# Altium PCB L80PCBFILE.PcbDoc
Units mm, origin at the board's own origin, x right, y up, seen from the top; angles counter-clockwise.
Board outline 108.02 x 109.16 mm, 4 copper layers (Top Layer, L2GP, L3GP, Bottom Layer), stack 1.072 mm thick; 53 components, 43 nets, 203 pads, 87 vias.
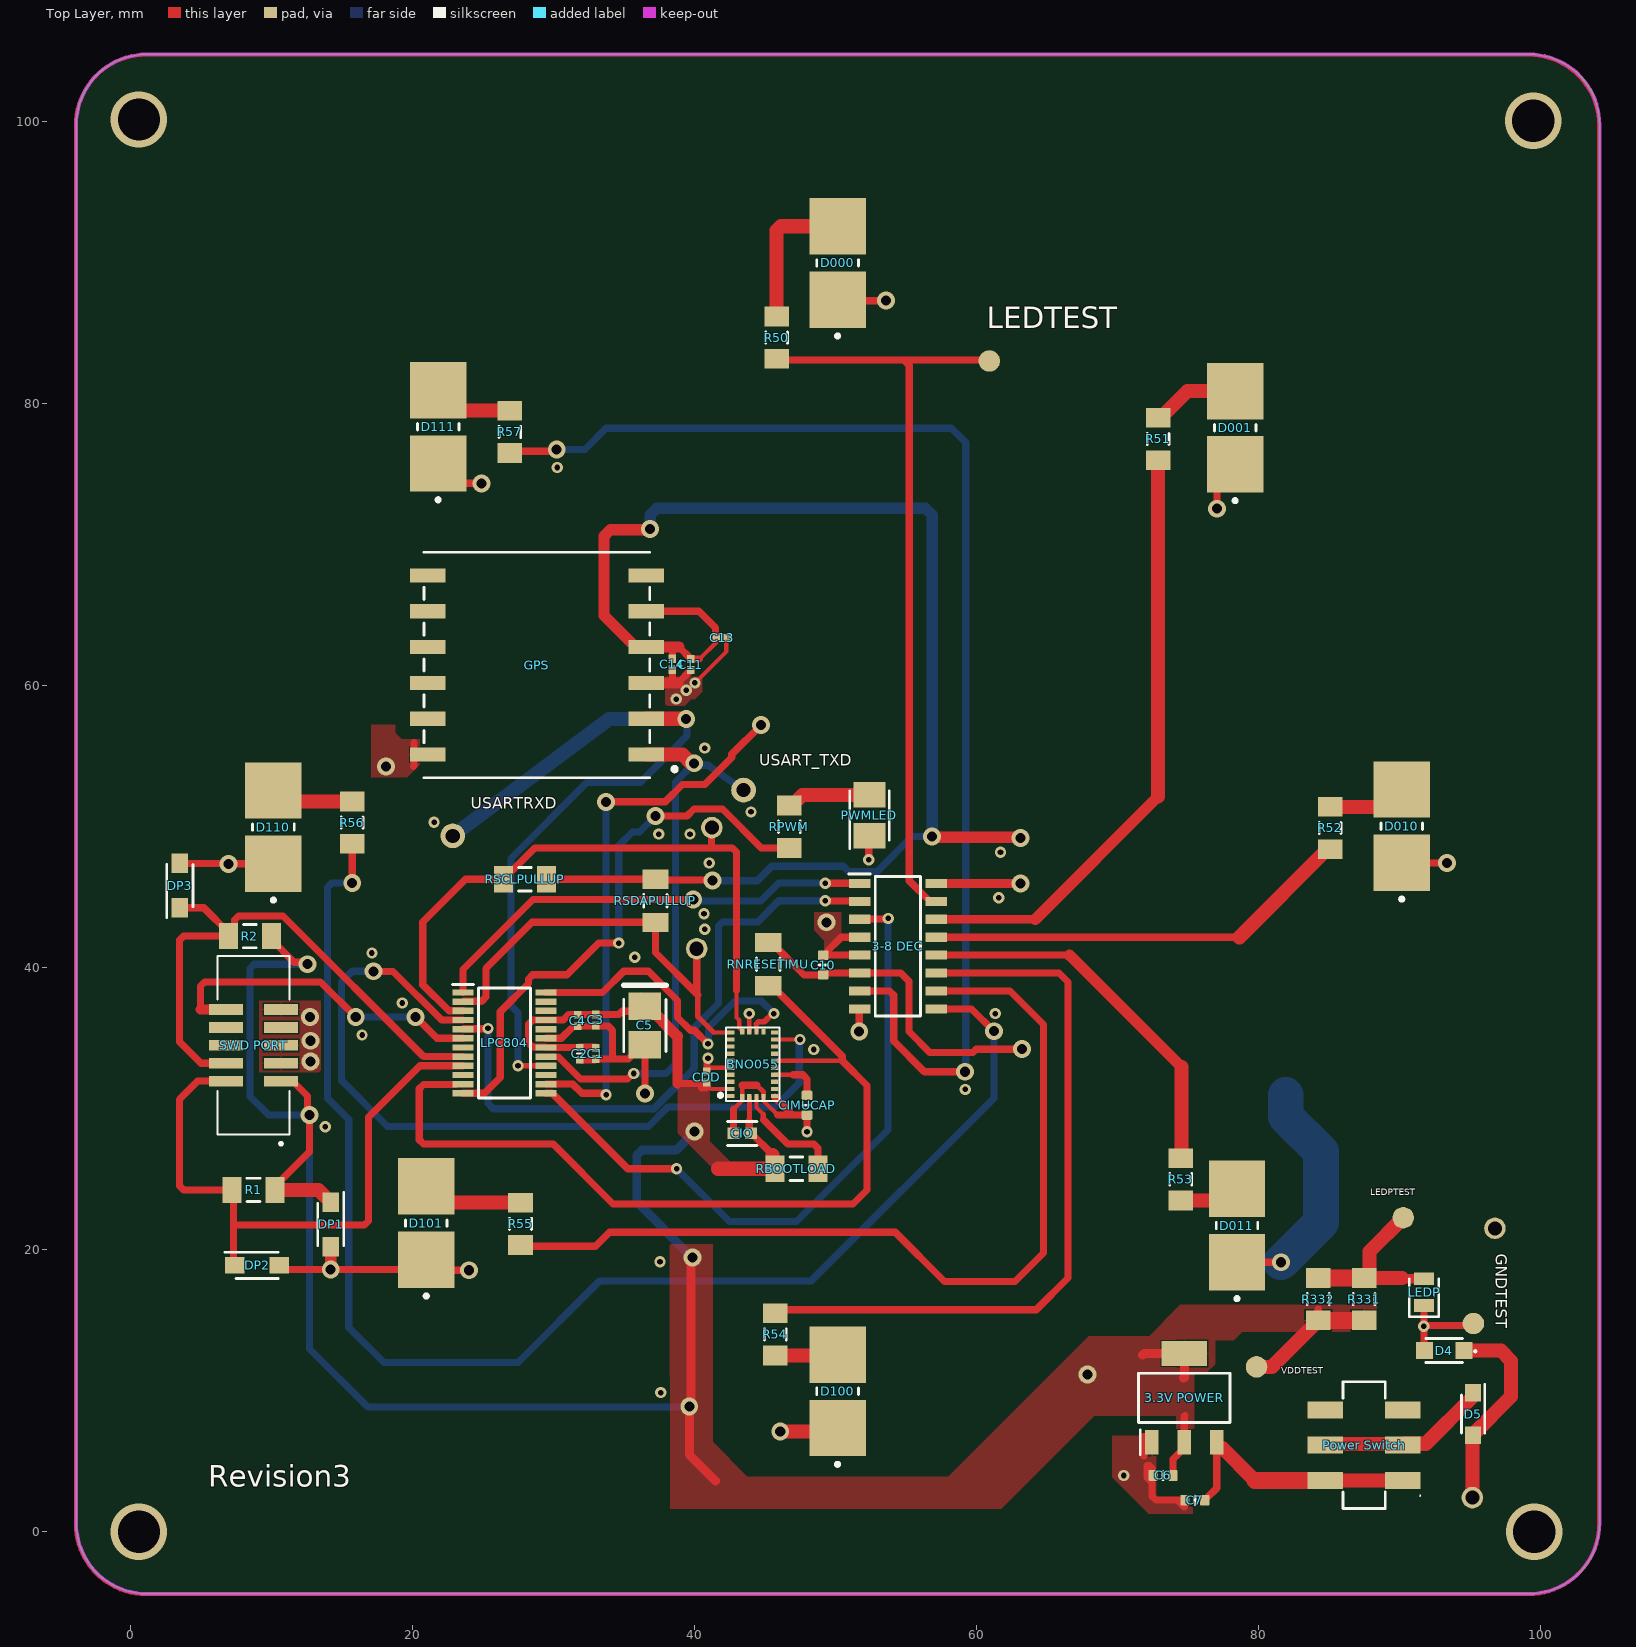
[diagram p0: Top Layer view]
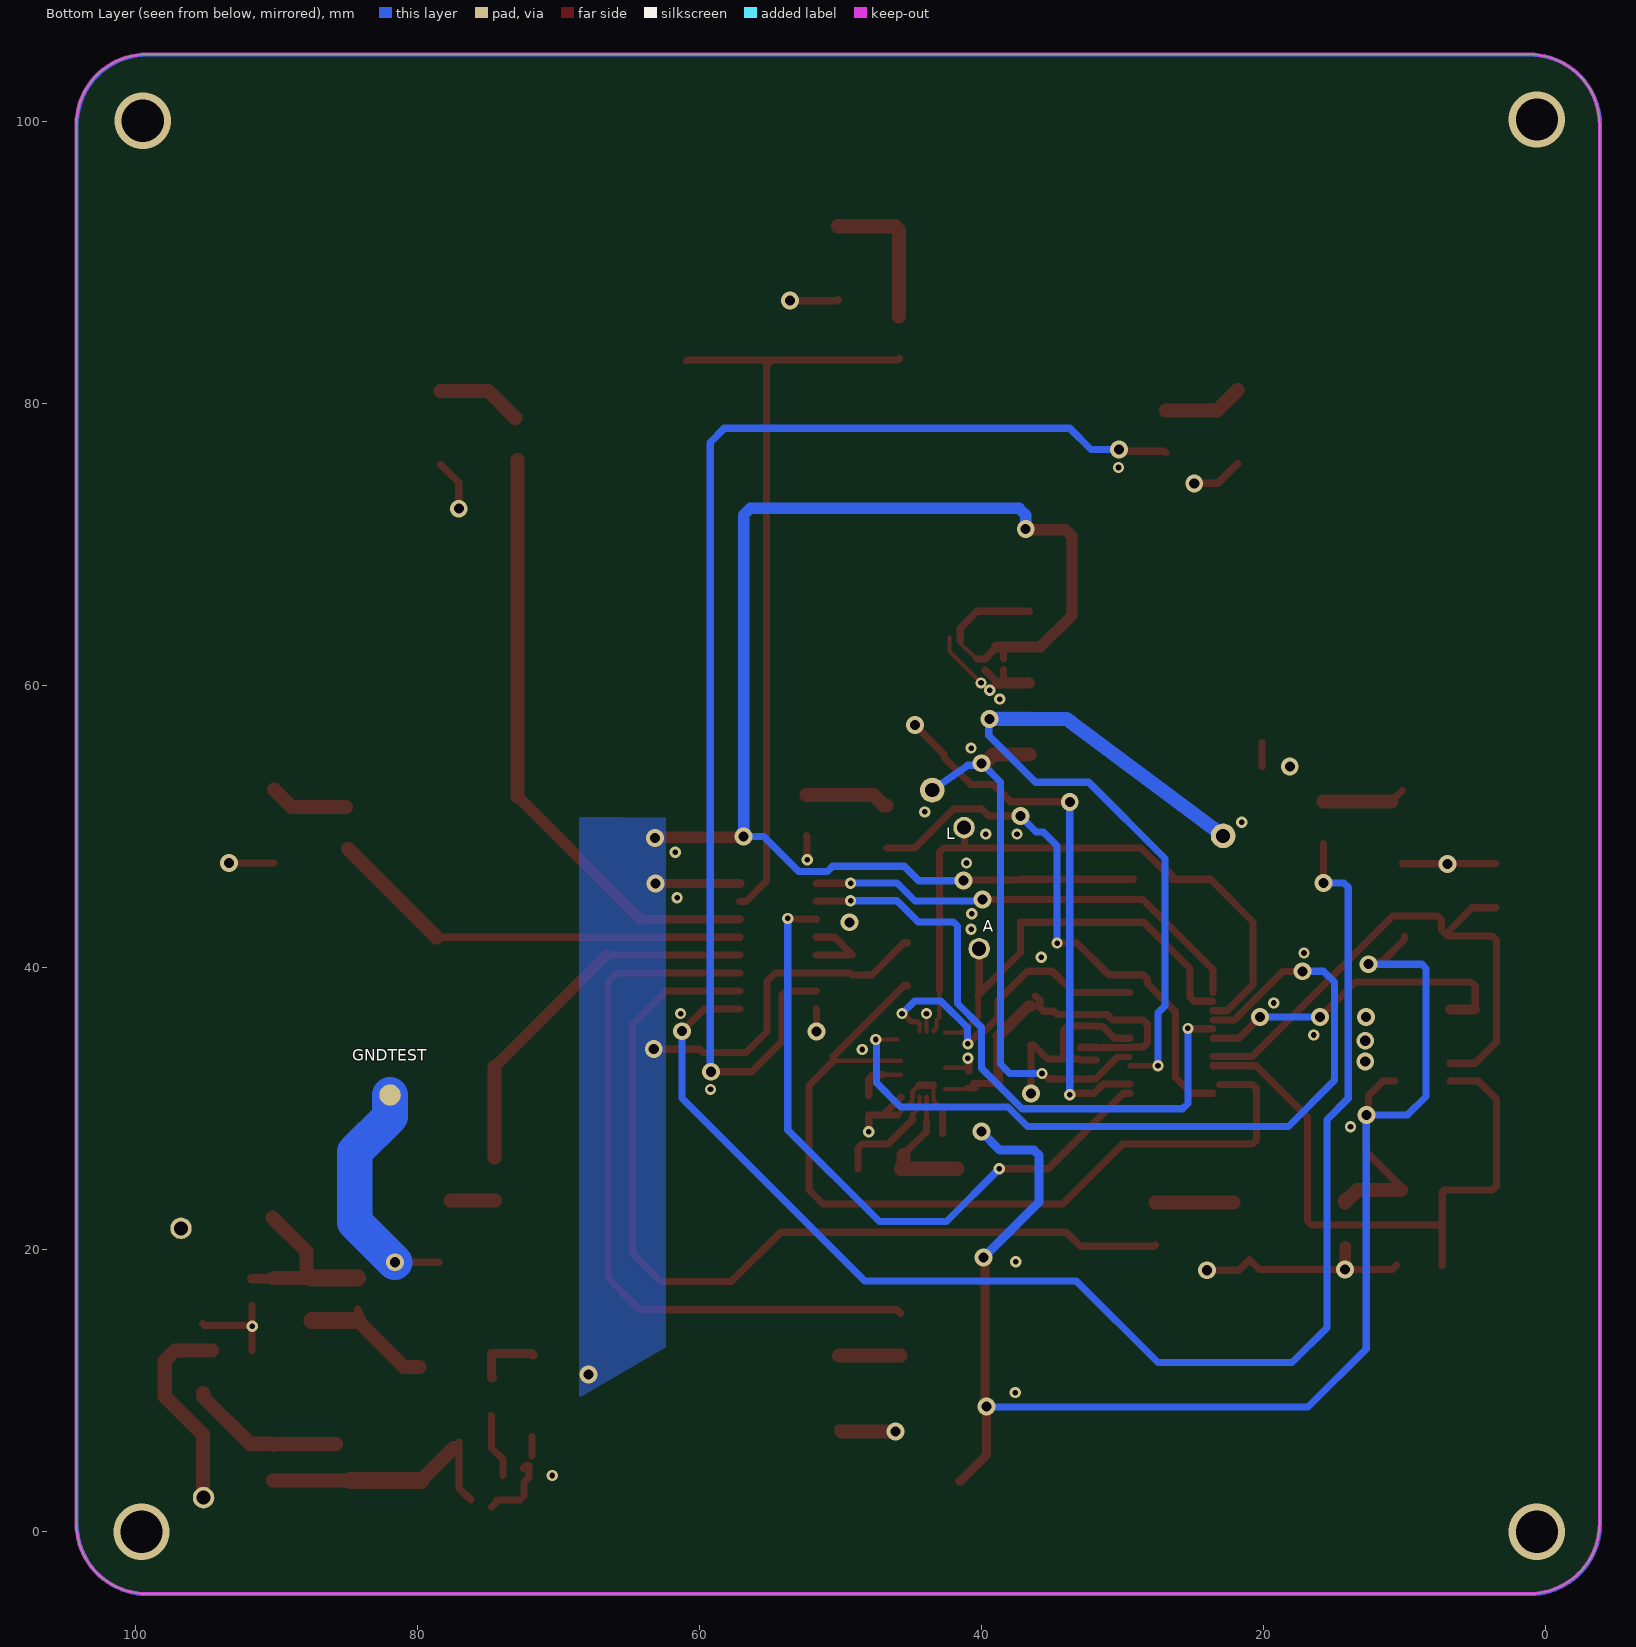
[diagram p1: Bottom Layer view, seen from below]
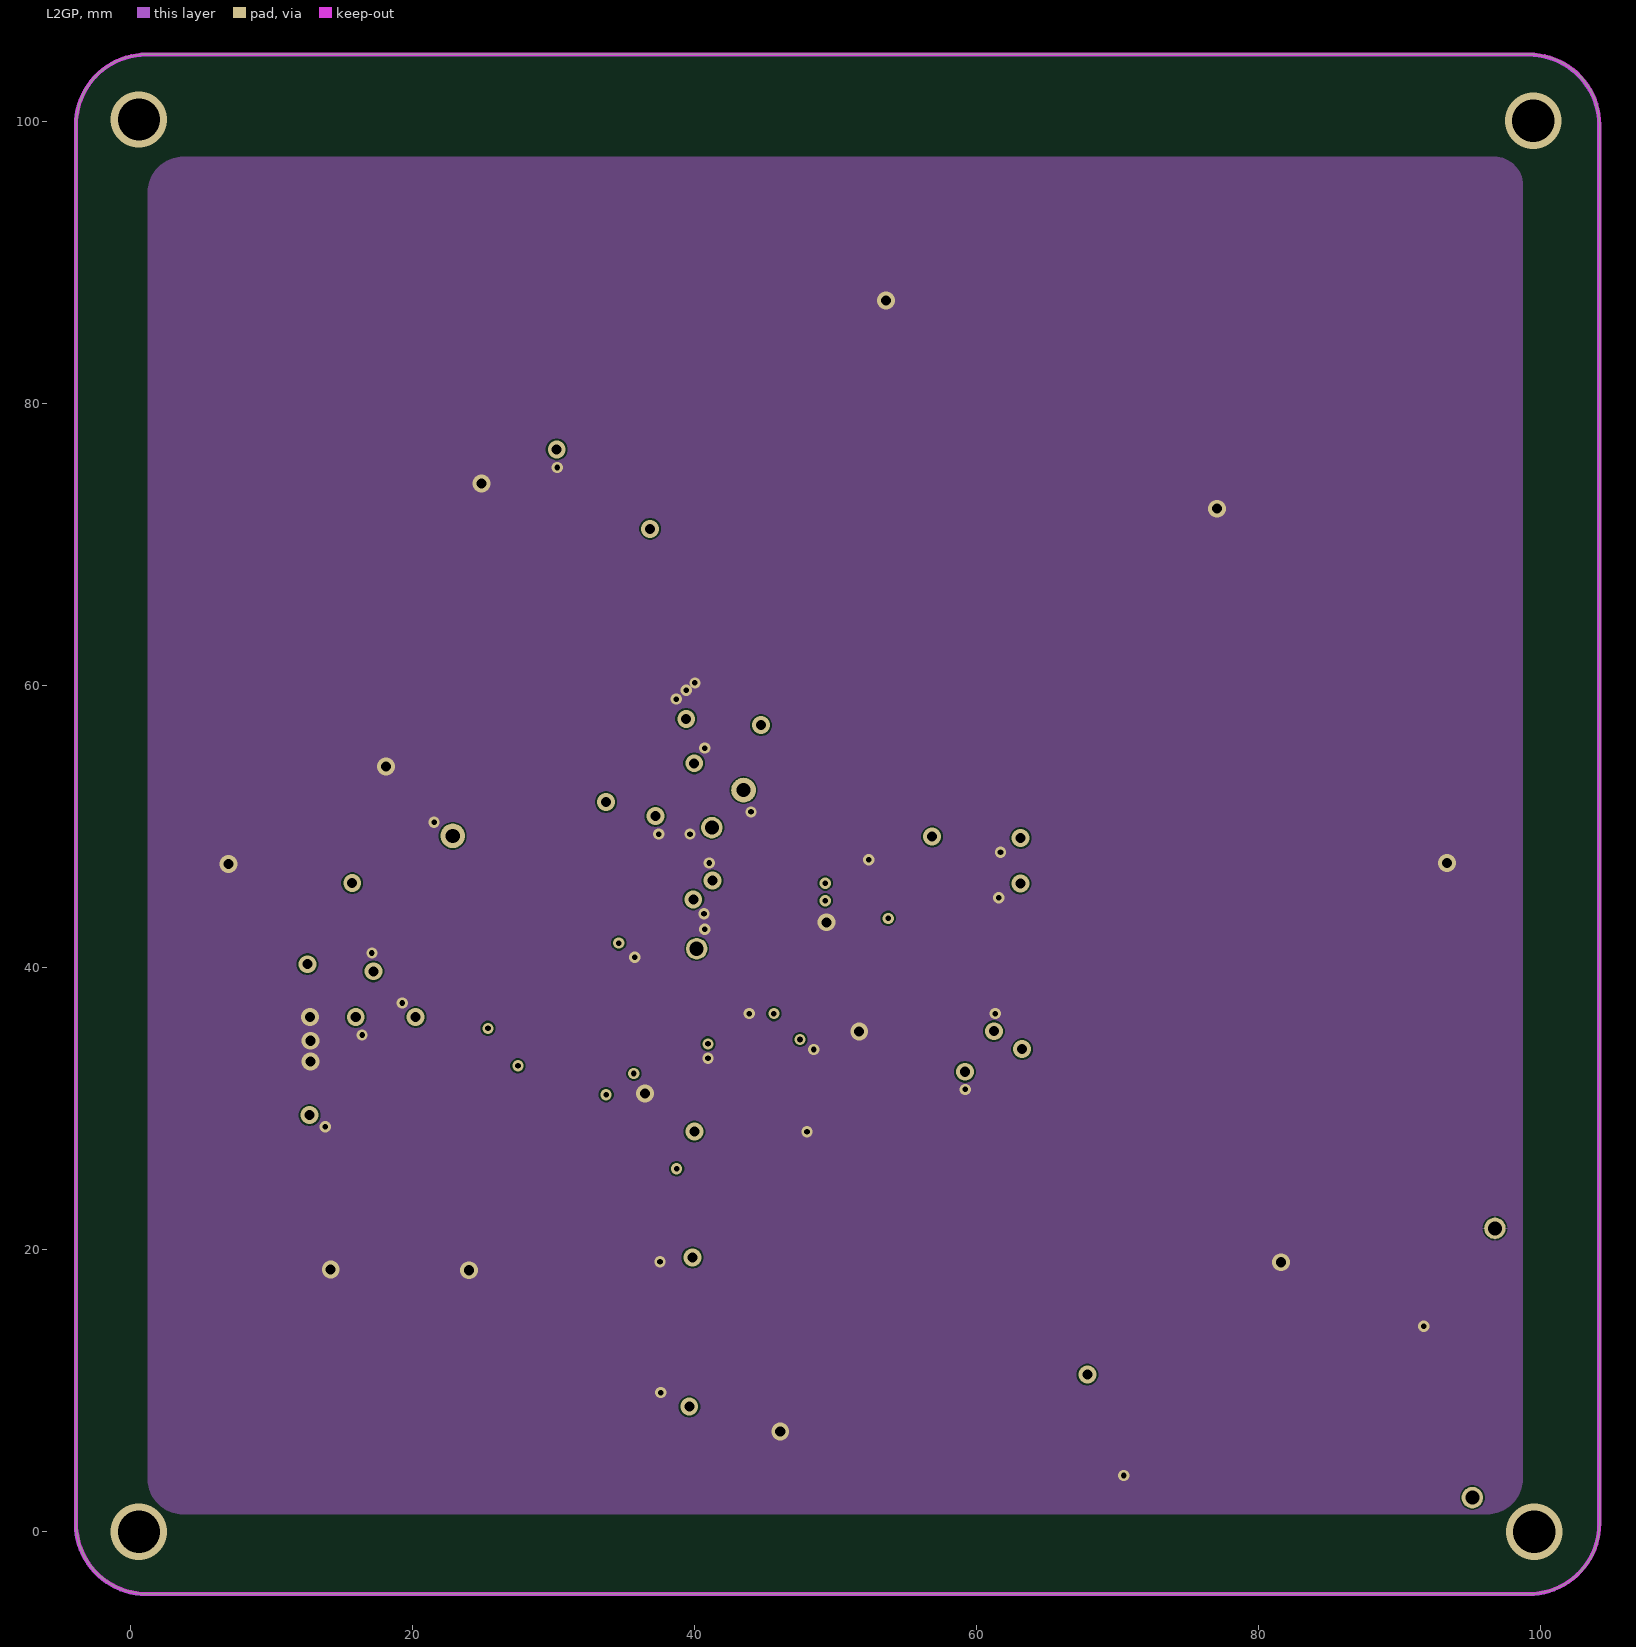
[diagram p2: L2GP]
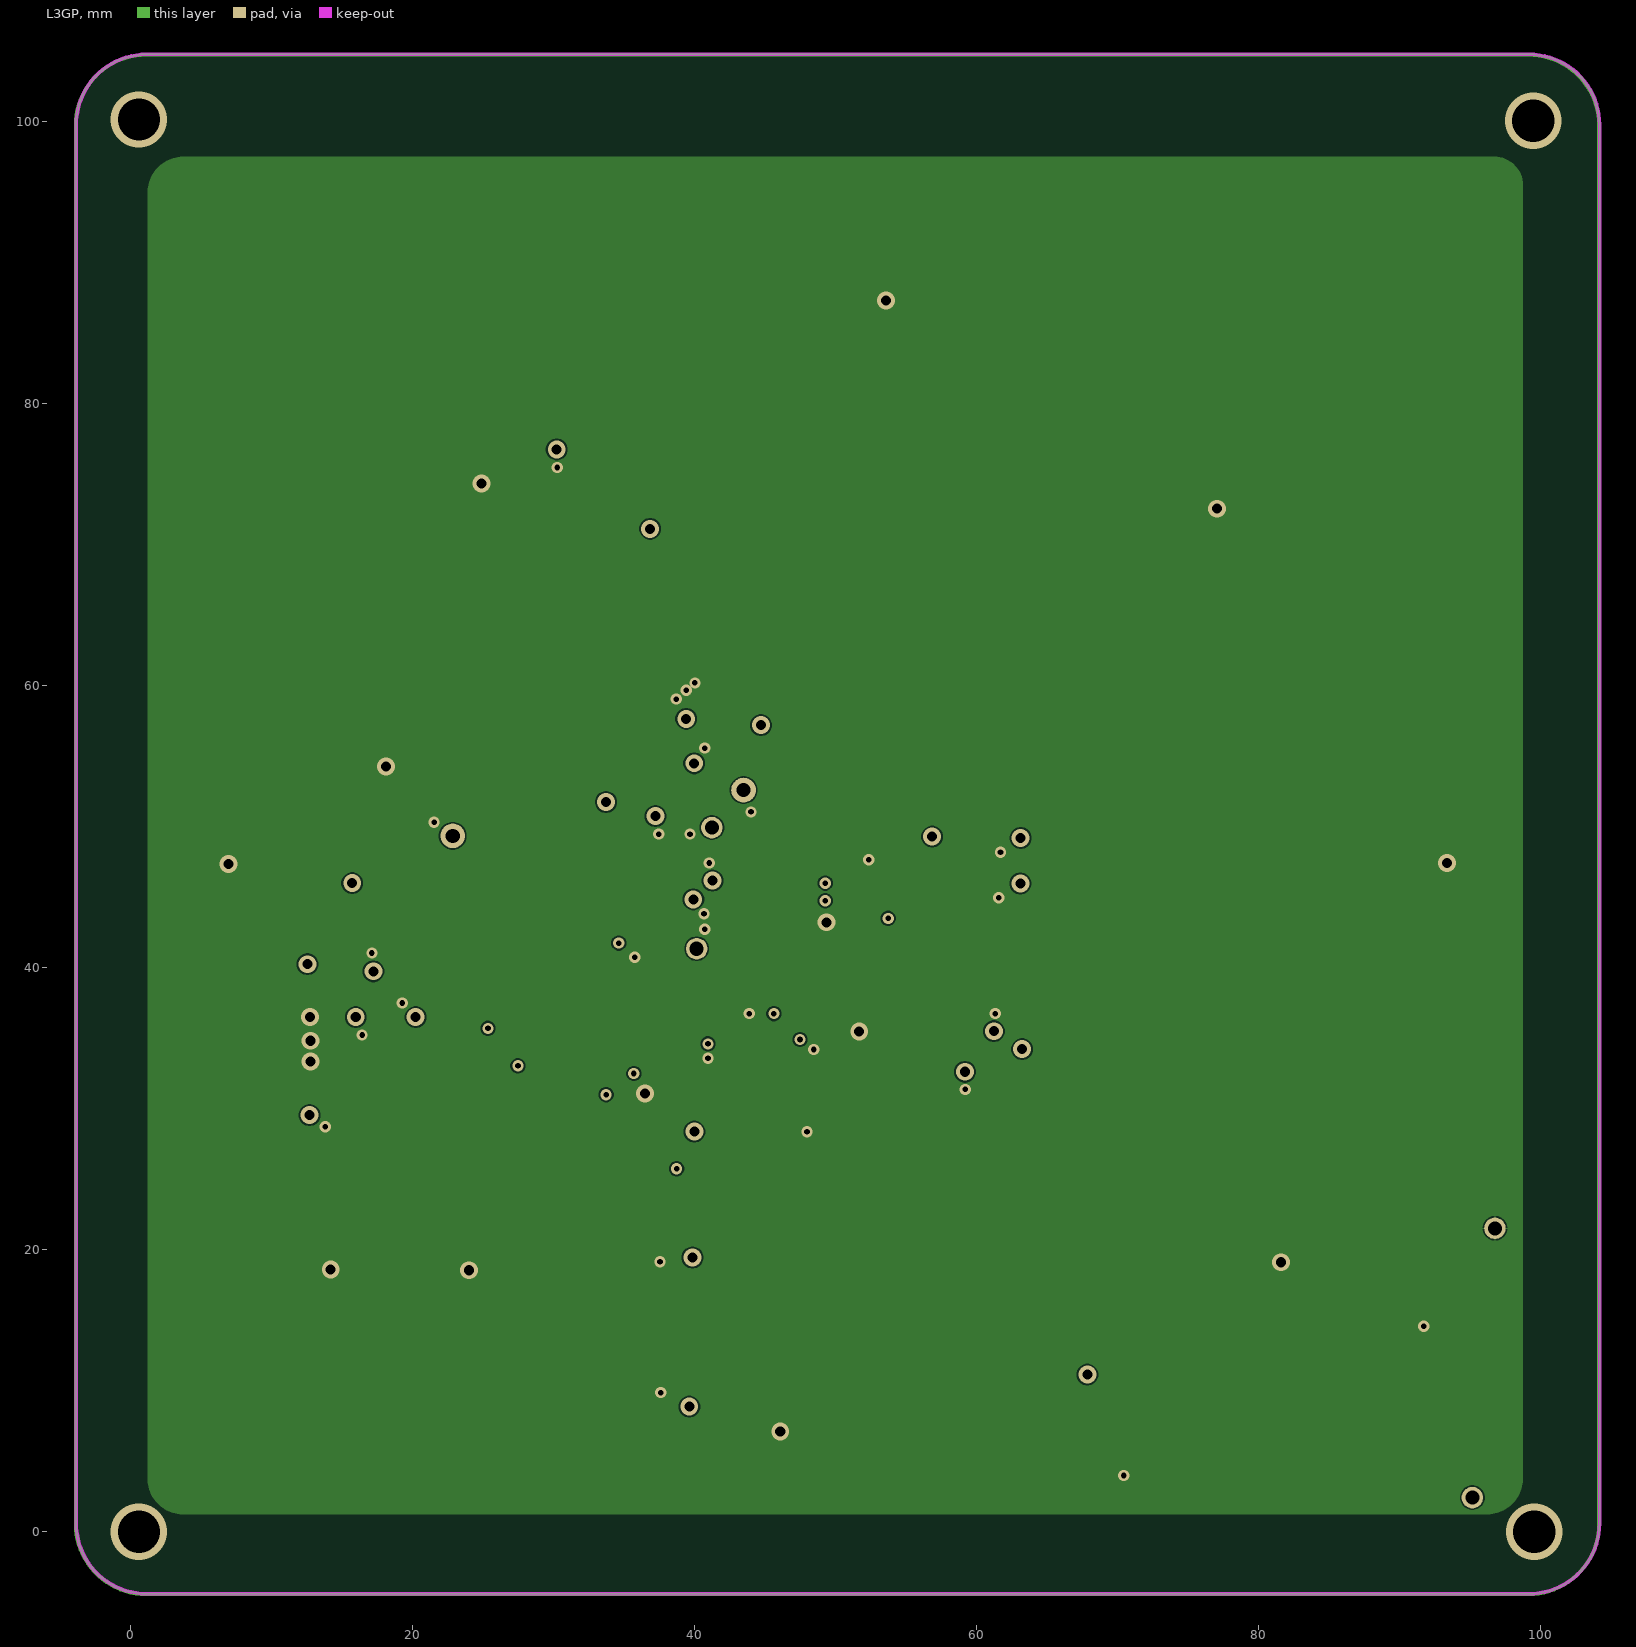
[diagram p3: L3GP]
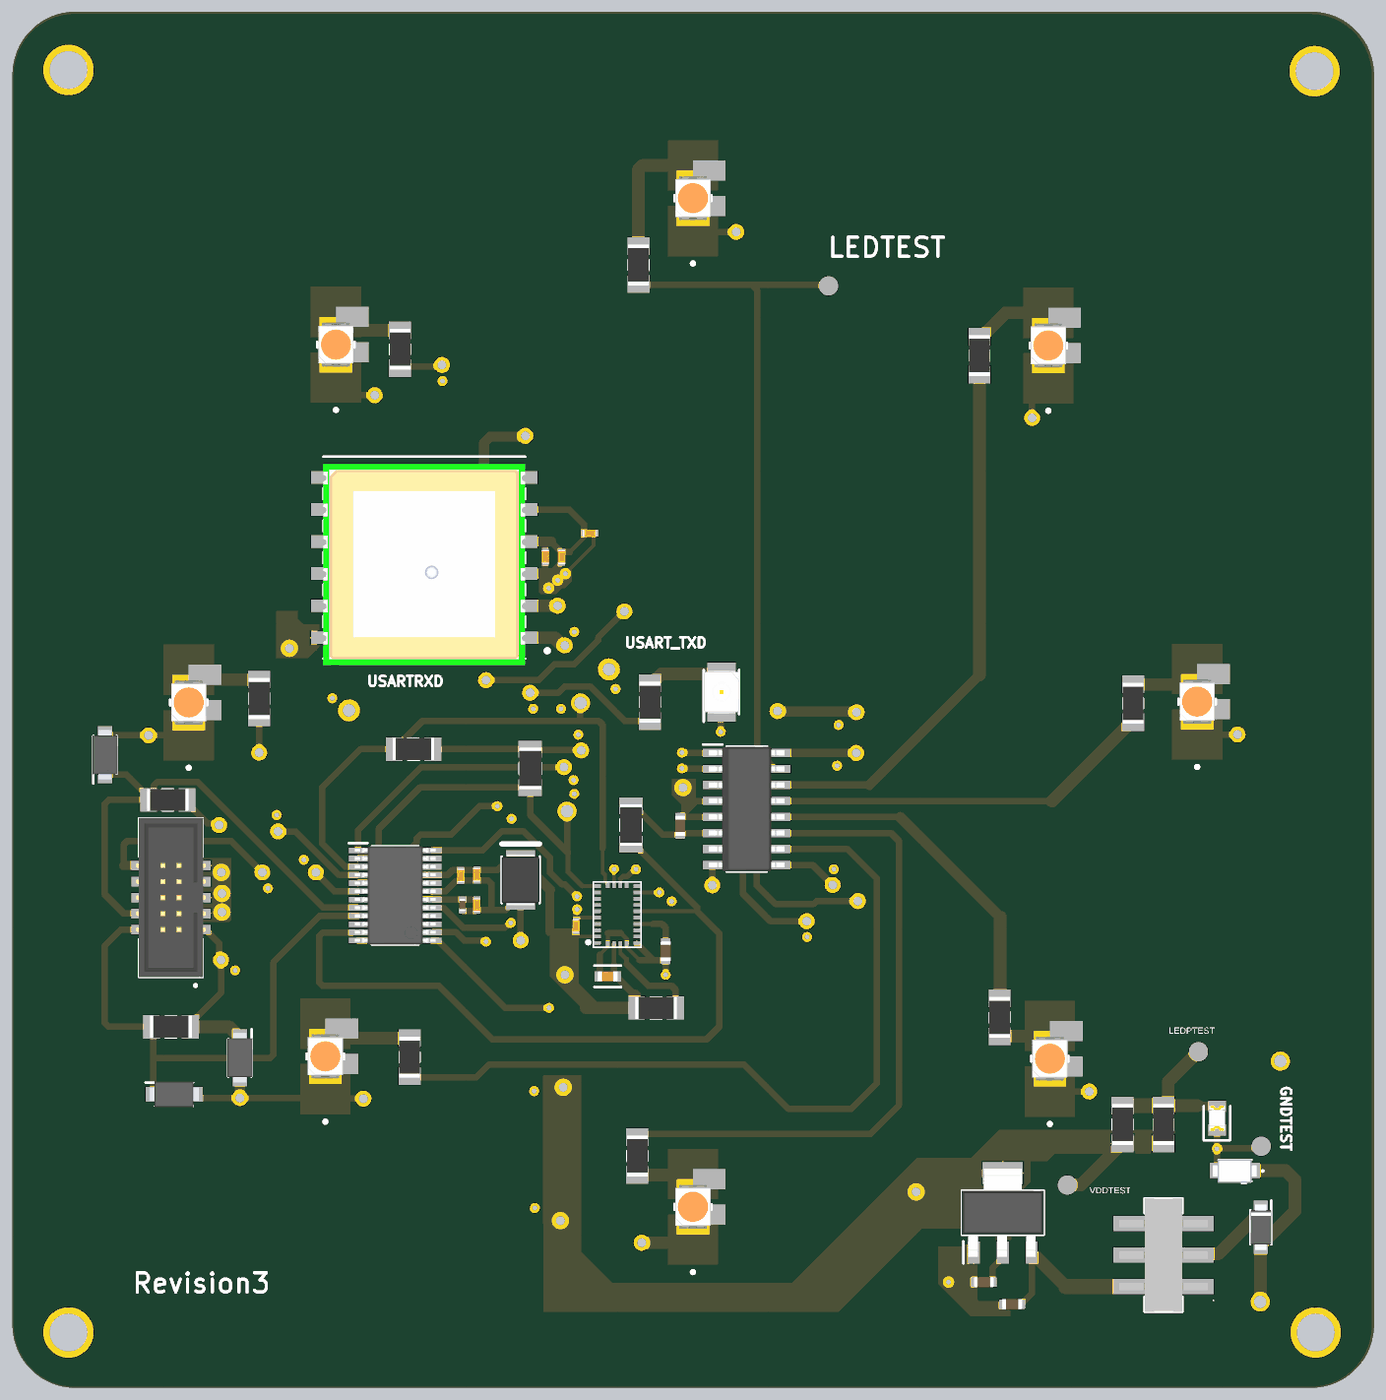
[diagram p4: 3D render of the assembled board from above, using the file's embedded part models]

## Layer stack, top to bottom
Top Solder: solder mask 0.0102, Solder Resist, Dk 3.5
Top Layer: signal copper 0.0356
Dielectric 2: prepreg 0.11, PP-017, Dk 4.3
L2GP: signal copper 0.035
Dielectric 1: core 0.7112, Core-039, Dk 4.8
L3GP: signal copper 0.035
Dielectric 3: prepreg 0.11, PP-017, Dk 4.3
Bottom Layer: signal copper 0.0356
Bottom Solder: solder mask 0.0102, Solder Resist, Dk 3.5

## Board outline
-3.818,0.612 -3.818,99.775 cw(c1.182,99.775) 1.182,104.775 99.2,104.775 cw(c99.2,99.775) 104.2,99.775 104.2,0.612 cw(c99.2,0.612) 99.2,-4.388 1.182,-4.388 cw(c1.182,0.612)

## Design rules (kind name [scope] priority, off if disabled: settings)
BoardOutlineClearance [All] p1: gap=0.2 ignorepadtopadclearanceinfootprint=FALSE
Clearance [All] p1: gap=0.102 ignorepadtopadclearanceinfootprint=TRUE except(0.127: Arc-Via Track-Via SMDPad-Via THPad-Via Via-Via Via-Fill Via-Poly Via-Region Via-Text; 0.254: Arc-Hole Track-Hole SMDPad-Hole THPad-Hole Via-Hole Fill-Hole Poly-Hole Region-Hole Text-Hole)
ComponentClearance [All] p1: gap=0.102 collisioncheckmode=3 verticalgap=0.102 showdistances=TRUE
DiffPairsRouting [All] p1: maxlimit=0.102 minlimit=0.102 mostfreqgap=0.102 toplayer_minwidth=0.102 toplayer_maxwidth=1816.048 toplayer_prefwidth=0.102 midlayer1_minwidth=0.102 midlayer1_maxwidth=1816.048 midlayer1_prefwidth=0.102 midlayer2_minwidth=0.102 midlayer2_maxwidth=1816.048 midlayer2_prefwidth=0.102 bottomlayer_minwidth=0.102 bottomlayer_maxwidth=1816.048 bottomlayer_prefwidth=0.102 maxuncoupledlength=12.7
Height [All] p1: minheight=0 maxheight=1816.048 prefheight=12.7
HoleSize [All] p1: absolutevalues=TRUE maxlimit=6.3 minlimit=0.2 maxpercent=80.000 minpercent=20.000
HoleToHoleClearance [All] p1: gap=0.254 allowstackedmicrovias=FALSE
MinimumAnnularRing [All] p1: minimumring=0.152
MinimumSolderMaskSliver [All] p1: minsoldermaskwidth=0.152
PlaneClearance [All] p1: clearance=0.102
PlaneConnect PlaneConnectPowerPads [InPadClass('PowerPads')] p1: planeconnectstyle=Direct reliefexpansion=0.508 reliefentries=4 reliefconductorwidth=0.254 reliefairgap=0.254
PlaneConnect [All] p2: pad.planeconnectstyle=Relief pad.reliefexpansion=0.3 pad.reliefentries=4 pad.reliefconductorwidth=0.102 pad.reliefairgap=0.102 via.planeconnectstyle=Direct via.reliefexpansion=0.3 via.reliefentries=4 via.reliefconductorwidth=0.127 via.reliefairgap=0.127
PolygonConnect PolygonConnectPowerPads [All vs (InPadClass('PowerPads'))] p1: connectstyle=Direct reliefconductorwidth=0.254 reliefentries=4 polygonreliefangle="90 Angle" airgapwidth=0.254
PolygonConnect [All] p2: thpad.connectstyle=Relief thpad.reliefconductorwidth=0.102 thpad.reliefentries=4 thpad.polygonreliefangle="90 Angle" thpad.airgapwidth=0.102 smdpad.connectstyle=Relief smdpad.reliefconductorwidth=0.102 smdpad.reliefentries=4 smdpad.polygonreliefangle="90 Angle" smdpad.airgapwidth=0.102 via.connectstyle=Direct via.reliefconductorwidth=0.127 via.reliefentries=4 via.polygonreliefangle="90 Angle" via.airgapwidth=0.127
RoutingVias [All] p1: holewidth=0.2 width=0.45 viastyle="Through Hole" minholewidth=0.2 minwidth=0.45 maxholewidth=6.3 maxwidth=6.55
SilkToSilkClearance [All] p1: silktosilkclearance=0.127
SilkToSolderMaskClearance [IsPad] p1: minsilkscreentomaskgap=0.127 clearancetoexposedcopper=TRUE
SolderMaskExpansion [All] p1: expansion=0.051 istentingtop=FALSE
UnRoutedNet [All] p1: checkbadconnections=TRUE
Width Power_20mil [All] p1: maxlimit=25.4 minlimit=0.508 preferedwidth=0.508 minimp=50.000000 maximp=50.000000 favimp=50.000000
Width Power_12mil [All] p2: maxlimit=25.4 minlimit=0.305 preferedwidth=0.305 minimp=50.000000 maximp=50.000000 favimp=50.000000
Width Width_10mil [OnLayer('Top Layer')] p3: maxlimit=25.4 minlimit=0.254 preferedwidth=0.254 minimp=50.000000 maximp=50.000000 favimp=50.000000
Width Width_6mil [All] p4: maxlimit=25.4 minlimit=0.152 preferedwidth=0.152 minimp=50.000000 maximp=50.000000 favimp=50.000000
Width Width_4mil [All] p5: maxlimit=25.4 minlimit=0.102 preferedwidth=0.102 minimp=50.000000 maximp=50.000000 favimp=50.000000
19 further rules are at their usual default settings.

## Components (designator, comment, footprint, x,y, rotation, side; value= is the part's Value field where it differs from the comment)
"3-8 DEC" "CD74HC238M96" SOIC127P600X175-16N 54.438,41.529 r0 top
"3.3V POWER" "TLV76133DCYR" SOT230P700X180-4N 74.75,9.5 r90 top
BNO055 "BNO055" LGA28R50P4X10_380X520X100 44.158,33.159 r90 top
C1 "Capacitor 0.1 uF +/- 5% 16 V 0402" CAPC1005X56X25LL10T15 33.02,33.918 r270 top value=100nF
C2 "Capacitor 10nF +/-20% 50V 0402" CAPC0402(1005)60_L 31.877,33.909 r270 top value=10nF
C3 "Capacitor 0.1 uF +/- 5% 16 V 0402" CAPC1005X56X25LL10T15 33.02,36.296 r270 top value=100nF
C4 "Capacitor 0.1 uF +/- 5% 16 V 0402" CAPC1005X56X25LL10T15 31.75,36.25 r270 top value=100nF
C5 "TAJB106K016RNJ" AVX-TAJ-B-2_N 36.5,35.906 r270 top value=10µF
C6 "Capacitor 1µF +/-0.1% 25V 0603" CAPC0603(1608)100_L 73.25,4 r180 top value=1µF
C7 "Capacitor 1µF +/-0.1% 25V 0603" CAPC0603(1608)100_L 75.5,2.25 r180 top value=1µF
C10 "Capacitor 1µF +/-0.1% 25V 0603" CAPC0603(1608)100_L 49.149,40.194 r90 top value=1µF
C11 "Capacitor 0.1 uF +/- 5% 16 V 0402" CAPC1005X56X25LL10T15 39.75,61.5 r270 top value=100nF
C13 "Capacitor 0.1 uF +/- 5% 16 V 0402" CAPC1005X56X25LL10T15 41.977,63.398 r0 top value=100nF
C14 "Capacitor 0.1 uF +/- 5% 16 V 0402" CAPC1005X56X25LL10T15 38.456,61.519 r90 top value=100nF (schematic designator C13)
CDD "Capacitor 0.1 uF +/- 5% 16 V 0402" CAPC1005X56X25LL10T15 40.894,32.25 r270 top value=100nF
CIMUCAP "Capacitor 1µF +/-0.1% 25V 0603" CAPC0603(1608)100_L 48,30.25 r270 top value=1µF
CIO "120n" FP-GCG188-0_2-IPC_C 43.407,28.25 r180 top
D000 "" Vishay_6.541-5067.01-4_0 50.165,89.976 r90 top value=SKIP
D001 "" Vishay_6.541-5067.01-4_0 78.359,78.292 r90 top value=SKIP
D4 "PTVS9V0S1UR,115" SOD123W 93.175,12.85 r180 top
D5 "MBR140SFT1G" SODFL3616X98N 95.225,8.35 r270 top
D010 "" Vishay_6.541-5067.01-4_0 90.17,50.038 r90 top value=SKIP
D011 "" Vishay_6.541-5067.01-4_0 78.486,21.717 r90 top value=SKIP
D100 "" Vishay_6.541-5067.01-4_0 50.165,9.966 r90 top value=SKIP
D101 "" Vishay_6.541-5067.01-4_0 21,21.9 r90 top value=SKIP
D110 "" Vishay_6.541-5067.01-4_0 10.16,49.971 r90 top value=SKIP
D111 "" Vishay_6.541-5067.01-4_0 21.844,78.359 r90 top value=SKIP
DP1 "SMF3.3" SOD3718X108N 14.225,21.8 r270 top
DP2 "SMF3.3" SOD3718X108N 9,18.9 r0 top
DP3 "SMF3.3" SOD3718X108N 3.525,45.825 r90 top
GPS "L80-M39" L80-M39 21.1,66.548 r0 top
LEDP "APT2012CGCK" LEDC2012X50N 91.75,17 r90 top
LPC804 "LPC804M101JDH24FP" SOP65P640X110-24N 26.543,34.671 r0 top
"Power Switch" "JS202011SCQN" JS202011SCQN 87.5,6.15 r90 top
PWMLED "LR_T67F-U1AA-1-1-Z" LEDM3528X210N 52.429,50.806 r90 top
R1 "Resistor 10k +/-1% 1206 250 mW" RESC3216X60X45ML15T20 8.75,24.25 r180 top value=10k
R2 "Resistor 10k +/-1% 1206 250 mW" RESC3216X60X45ML15T20 8.5,42.25 r180 top value=10k
R50 "Resistor 4k7 +/-1% 1206 250 mW" RESC3116X70X50ML13T20 45.847,84.685 r90 top value=47ohm
R51 "Resistor 4k7 +/-1% 1206 250 mW" RESC3116X70X50ML13T20 72.898,77.494 r90 top value=47ohm
R52 "Resistor 4k7 +/-1% 1206 250 mW" RESC3116X70X50ML13T20 85.09,49.911 r90 top value=47ohm
R53 "Resistor 4k7 +/-1% 1206 250 mW" RESC3116X70X50ML13T20 74.5,25 r270 top value=47ohm
R54 "Resistor 4k7 +/-1% 1206 250 mW" RESC3116X70X50ML13T20 45.75,14 r270 top value=47ohm
R55 "Resistor 4k7 +/-1% 1206 250 mW" RESC3116X70X50ML13T20 27.686,21.844 r90 top value=47ohm
R56 "Resistor 4k7 +/-1% 1206 250 mW" RESC3116X70X50ML13T20 15.748,50.292 r90 top value=47ohm
R57 "Resistor 4k7 +/-1% 1206 250 mW" RESC3116X70X50ML13T20 26.924,78.002 r90 top value=47ohm
R331 "Resistor 1k +/-1% 1206 250 mW" RESC3116X70X50ML13T20 87.5,16.5 r90 top
R332 "Resistor 1k +/-1% 1206 250 mW" RESC3116X70X50ML13T20 84.25,16.5 r90 top value=510
RBOOTLOAD "Resistor 10k +/-1% 1206 250 mW" RESC3216X60X45ML15T20 47.25,25.75 r0 top value=10k
RNRESETIMU "Resistor 10k +/-1% 1206 250 mW" RESC3216X60X45ML15T20 45.25,40.25 r90 top value=10k
RPWM "Resistor 4k7 +/-1% 1206 250 mW" RESC3116X70X50ML13T20 46.75,50 r90 top value=47ohm
RSCLPULLUP "Resistor 10k +/-1% 1206 250 mW" RESC3216X60X45ML15T20 28,46.275 r0 top value=10k
RSDAPULLUP "Resistor 10k +/-1% 1206 250 mW" RESC3216X60X45ML15T20 37.25,44.75 r90 top value=10k
"SWD PORT" "20021521-00010C4LF" AMPHENOL_20021521-00010C4LF 8.75,34.5 r90 top

## Footprints (in the part's own frame and the unit in brackets; to place one, negate y for a bottom-side part, rotate by r counter-clockwise, add the part's x,y. Pads: shape width x height; smd on the part's side, far side on the other; paste and mask are expansions set on the pad)
AMPHENOL_20021521-00010C4LF [mm]
  rect 0.76x2.4 smd: 01(-2.54,-1.95) 02(-2.54,1.95) 03(-1.27,-1.95) 04(-1.27,1.95) 05(0,-1.95) 06(0,1.95) 07(1.27,-1.95) 08(1.27,1.95) 09(2.54,-1.95) 10(2.54,1.95)
  silkscreen extent -7.07,-2.55 6.33,2.55, body extent -6.32,-2.75 6.32,2.75, height 5.6
AVX-TAJ-B-2_N [mm] "Molded Capacitor, 2-Leads, Body 3.7x3mm, IPC Medium Density"
  rect 1.95x2.3 smd: 1(-1.375,0) 2(1.375,0)
  silkscreen extent -2.85,-1.5 1.85,1.5, body extent -2.07,-1.5 2.07,1.5, height 2.1
CAPC0402(1005)60_L [mm] "Chip Capacitor, Body 1.0x0.5mm, Height 0.6mm, IPC High Density"
  rrect25% 0.5x0.55 smd: 1(-0.45,0) 2(0.45,0)
  silkscreen extent 0,-0.2 0,0.2, body extent -0.5,-0.25 0.5,0.25, height 0.6
CAPC0603(1608)100_L [mm] "Chip Capacitor, Body 1.6x0.8mm, Height 1.0mm, IPC High Density"
  rrect25% 0.66x0.76 smd: 1(-0.7,0) 2(0.7,0)
  silkscreen extent 0,-0.3 0,0.3, body extent -0.8,-0.4 0.8,0.4, height 0.95
CAPC1005X56X25LL10T15 [mm] "Chip Capacitor, 2-Leads, Body 1.10x0.60mm, IPC High Density"
  rect 0.58x0.54 smd: 1(-0.39,0) 2(0.39,0)
  body extent -0.55,-0.3 0.55,0.3, height 0.56
FP-GCG188-0_2-IPC_C [mm]
  rect 0.855x0.812 smd paste+0 mask+0: 1(-0.626,0) 2(0.626,0)
  silkscreen extent -1.05,-0.85 1.05,0.85, body extent -1.15,-0.55 1.15,0.55, height 0.25
JS202011SCQN [mm]
  rect 1.2x2.5 smd: 1(-2.5,-2.75) 2(0,-2.75) 3(2.5,-2.75) 4(2.5,2.75) 5(0,2.75) 6(-2.5,2.75)
  silkscreen extent -4.5,-4 4.5,1.5, body extent -4.5,-3.5 4.5,3.5, height 5.65
L80-M39 [mm]
  rect 2.5x1 smd: 1(15.5,-11.43) 2(15.5,-8.89) 3(15.5,-6.35) 4(15.5,-3.81) 5(15.5,-1.27) 6(15.5,1.27) 7(0,1.27) 8(0,-1.27) 9(0,-3.81) 10(0,-6.35) 11(0,-8.89) 12(0,-11.43)
  silkscreen extent -0.25,-13.08 17.65,2.92, body extent -0.26,-13.62 15.74,2.38, height 6.95
LEDC2012X50N [mm]
  rect 0.9x1.4 smd: 1(-0.95,0) 2(0.95,0)
  silkscreen extent -1.75,-1.05 0.95,1.05, body extent -1,-0.63 1,0.63, height 0.4
LEDM3528X210N [mm]
  rect 1.8x2.25 smd: 1(-1.45,0) 2(1.45,0)
  silkscreen extent -2.35,-1.4 1.75,1.4, body extent -1.75,-1.39 1.75,1.39, height 1.92
LGA28R50P4X10_380X520X100 [mm]
  rect 0.3x0.525 smd: 1(-2.25,1.563) 6(-2.25,-1.562) 7(-1.75,-1.562) 8(-1.25,-1.562) 9(-0.75,-1.562) 10(-0.25,-1.562) 11(0.25,-1.562) 12(0.75,-1.562) 13(1.25,-1.562) 14(1.75,-1.562) 15(2.25,-1.562) 20(2.25,1.563) 21(1.75,1.563) 22(1.25,1.563) 23(0.75,1.563) 24(0.25,1.563) 25(-0.25,1.563) 26(-0.75,1.563) 27(-1.25,1.563) 28(-1.75,1.563)
  rect 0.425x0.3 smd: 2(-2.312,0.75) 3(-2.312,0.25) 4(-2.312,-0.25) 5(-2.312,-0.75) 16(2.313,-0.75) 17(2.313,-0.25) 18(2.313,0.25) 19(2.313,0.75)
  silkscreen extent -2.6,-1.9 2.6,2.4
RESC3116X70X50ML13T20 [mm] "Chip Resistor, 2-Leads, Body 3.25x1.65mm, IPC Low Density"
  rect 1.4x1.75 smd: 1(-1.5,0) 2(1.5,0)
  silkscreen extent -0.4,-0.78 0.4,0.78, body extent -1.63,-0.82 1.63,0.82, height 0.7
RESC3216X60X45ML15T20 [mm] "Chip Resistor, 2-Leads, Body 3.3x1.75mm, IPC Low Density"
  rect 1.35x1.85 smd: 1(-1.525,0) 2(1.525,0)
  silkscreen extent -0.45,-0.82 0.45,0.82, body extent -1.65,-0.87 1.65,0.87, height 0.6
SOD123W [mm]
  rect 1.2x1.2 smd: 1(-1.4,0) 2(1.4,0)
  silkscreen extent -2.25,-0.85 1.3,0.85, body extent -1.72,-0.88 1.78,1.12, height 1.07
SOD3718X108N [mm]
  rect 1.375x1.15 smd: 1(-1.575,0) 2(1.575,0)
  silkscreen extent -2.26,-0.92 1.5,0.92, body extent -1.95,-1 1.95,1, height 1.18
SODFL3616X98N [mm]
  rect 1.24x1.12 smd: 1(-1.5,0) 2(1.5,0)
  silkscreen extent -2.12,-0.82 1.35,0.82, body extent -1.8,-0.82 1.8,0.82, height 0.98
SOIC127P600X175-16N [mm]
  rect 1.525x0.65 smd: 1(-2.712,4.445) 2(-2.712,3.175) 3(-2.712,1.905) 4(-2.712,0.635) 5(-2.712,-0.635) 6(-2.712,-1.905) 7(-2.712,-3.175) 8(-2.712,-4.445) 9(2.712,-4.445) 10(2.712,-3.175) 11(2.712,-1.905) 12(2.712,-0.635) 13(2.712,0.635) 14(2.712,1.905) 15(2.712,3.175) 16(2.712,4.445)
  silkscreen extent -3.47,-4.95 1.6,5.12, body extent -3.01,-4.95 3.01,4.95, height 1.75
SOP65P640X110-24N [mm]
  rect 1.475x0.45 smd: 1(-2.938,3.575) 2(-2.938,2.925) 3(-2.938,2.275) 4(-2.938,1.625) 5(-2.938,0.975) 6(-2.938,0.325) 7(-2.938,-0.325) 8(-2.938,-0.975) 9(-2.938,-1.625) 10(-2.938,-2.275) 11(-2.938,-2.925) 12(-2.938,-3.575) 13(2.938,-3.575) 14(2.938,-2.925) 15(2.938,-2.275) 16(2.938,-1.625) 17(2.938,-0.975) 18(2.938,-0.325) 19(2.938,0.325) 20(2.938,0.975) 21(2.938,1.625) 22(2.938,2.275) 23(2.938,2.925) 24(2.938,3.575)
  silkscreen extent -3.67,-3.9 1.85,4.15, body extent -3.21,-3.89 3.21,3.91, height 1
SOT230P700X180-4N [mm]
  rect 1.75x0.95 smd: 1(-3.15,2.3) 2(-3.15,0) 3(-3.15,-2.3)
  rect 1.75x3.2 smd: 4(3.15,0)
  silkscreen extent -4.02,-3.25 1.75,3.25, body extent -3.5,-3.25 3.5,3.25, height 1.68
Vishay_6.541-5067.01-4_0 [mm]
  rect 4x4 smd paste-1000 mask-1000: 1(-2.6,0) 2(2.6,0)
  silkscreen extent -5.3,-1.47 0.22,1.47, body extent -4.7,-2.1 4.7,2.1, height 0.25

## Part data
"3-8 DEC": "Integrated Circuit", Manufacturer_Name="Texas Instruments", Mouser Part Number=595-CD74HC238M96, Arrow Part Number=CD74HC238M96, Arrow Price/Stock=https://www.arrow.com/en/products/cd74hc238m96/texas-instruments?region=nac, Datasheet Link=http://www.ti.com/lit/gpn/cd74hc238, Height=1.75mm, Manufacturer_Part_Number=CD74HC238M96, Mouser Price/Stock=https://www.mouser.co.uk/ProductDetail/Texas-Instruments/CD74HC238M96?qs=xFfolx0DHx3P6Uay1tPIpg%3D%3D
"3.3V POWER": "Integrated Circuit", Manufacturer_Name="Texas Instruments", Mouser Part Number=595-TLV76133DCYR, Arrow Part Number=TLV76133DCYR, Arrow Price/Stock=https://www.arrow.com/en/products/tlv76133dcyr/texas-instruments?region=nac, Datasheet Link=https://www.ti.com/lit/ds/symlink/tlv761.pdf?ts=1679984111185&ref_url=https%253A%252F%252Fwww.ti.com%252Fsitesearch%252Fen-us%252Fdocs%252Funiversalsearch.tsp%253FlangPref%253Den-US%2526searchTerm%253DTLV76133DCYR%2526nr%253D2, Height=1.8mm, Manufacturer_Part_Number=TLV76133DCYR, Mouser Price/Stock=https://www.mouser.co.uk/ProductDetail/Texas-Instruments/TLV76133DCYR?qs=9vOqFld9vZV5BPjUhjTZUA%3D%3D
BNO055: library part CMP-015-000000-1, "BNO055 9-axis Absolute Orientation Sensor ( SiP ) w/Sensors and Sensor Fusion", Package=None, Availability=Unavailable, Component Type=Standard, Design Item ID=BNO055, MP=BNO055, Pin Count=19, Price=None, Source=BNO055.SchLib
C1 C3 C4 C11 C13 C14 CDD: library part CMP-001-00001-6, "Chip Capacitor, 0.1 uF, +/- 5%, 16 V, 0402 (1005 Metric)", Capacitor Type=Ceramic, Case/Package=0402, Max Operating Temperature=125°C, Min Operating Temperature=-55°C, Tolerance=5%, Voltage Rating=16V, Mounting Technology=SM, Pins=2, RoHS Compliant=True
C2: library part CMP-001-00069-3, "Chip Capacitor, 10nF +/-20%, 50V, 0402, Thickness 0.6 mm", Case/Package=0402, Max Operating Temperature=85°C, Min Operating Temperature=-55°C, Tolerance=5%, Voltage Rating=50V, Mounting Technology=SMT, Pins=2
C5: library part CMP-001-00043-7, "Standard Tantalum, 10 uF, +/- 10%, 16 V, -55 to 125 degC, 1210 (3528 Metric), RoHS, Tape and Reel", Capacitor Type=Tantalum, Case/Package=1210, Manufacturer=AVX, Max Operating Temperature=125°C, Min Operating Temperature=-55°C, Package Description="2-Pin Surface Mount Device, Body 3.5 x 2.85 mm", Package Quantity=2000, Package Reference=TAJ-B-2, Resistance=2.8Ohm, Tolerance=10%, Voltage Rating=16V, Datasheet URL=http://datasheets.avx.com/TAJ.pdf, Datasheet Version=Feb-16, ESR=2.8Ohm, Manufacturer URL=http://www.avx.com/, Mounting Technology=SM, Packaging=TapeandReel, Pins=2, RoHS Compliant=True
C6 C7 C10 CIMUCAP: library part CMP-001-00055-4, "Chip Capacitor, 1µF +/-0.1%, 25V, 0603, Thickness 1 mm", Case/Package=0603, Max Operating Temperature=85°C, Min Operating Temperature=-55°C, Tolerance=20%, Voltage Rating=25V, Mounting Technology=SMT, Pins=2
CIO: library part CMP-06035-040836-1, "AgPd Termination Conductive Glue Mounting Chip Multilayer Ceramic Capacitors for Automotive 0.12uF with 20% as tolerance, 25V X7R 15%, 0603 Package"
D000 D001 D010 D011 D100 D101 D110 D111: library part CMP-004-00032-1, "DIODE LED ORANGE CLEAR 2PLCC SMD", Ambient Temperature Range High=+100°C, Ambient Temperature Range Low=-40°C, Capacitance=SKIP, Case/Package=6.541-5067.01-4, Colour=ORANGE, Digikey Part Number=VLMF31Q2T1-GS08CT-ND, Forward Current=20mA, Forward Voltage=2V, Manufacturer=Vishay, Max Junction Temp=+125°C, Mouser Part Number=78-VLMF31Q2T1, Part Number=VLMF31Q2T1-GS08, Power Dissipation=80mW, Reverse Voltage=5V, Temperature="-40°C to +100°C", Temperature Range High=100°C, ComponentLink1Description=Upverter, ComponentLink1URL=https://upverter.com/upn/revision/500a7bd41ff89176/, ComponentLink2Description=Datasheet, ComponentLink2URL=http://www.vishay.com/docs/81330/vlmf31.pdf, Datasheet Path=datasheets/Diode_Vishay_VLMF31Q2T1-GS08_eec.pdf, Datasheet Path1=datasheets/Diode_Vishay_VLMF31Q2T1-GS08_eec.pdf, Digikey Description="DIODE LED ORANGE CLEAR 2PLCC SMD", Height=1.85mm, HelpURL=https://upverter.com/upn/revision/500a7bd41ff89176/, Inductance=SKIP, Lead Free=yes, Led Orientation="Top View", Library Path1=parts/Diode_Vishay_VLMF31Q2T1-GS08_eec.SchLib, Library Ref1=VLMF31Q2T1-GS08, Luminous Intensity=200mcd, Mouser Description="Standard LEDs - SMD Orange Clr Non-Diff", Price=0.0926499962103, Resistance=SKIP, RoHS=TRUE, Temperature Range Low=-40°C, Verification Version=0.0.0.1, Viewing Angle=120º, Voltage=SKIP, Wavelength=605nm
D4: "Diode ESD (Uni-directional)", Manufacturer_Name=Nexperia, Mouser Part Number=771-PTVS9V0S1UR115, Datasheet Link=https://assets.nexperia.com/documents/data-sheet/PTVSXS1UR_SER.pdf, Manufacturer_Part_Number=PTVS9V0S1UR,115, Mouser Price/Stock=https://www.mouser.co.uk/ProductDetail/Nexperia/PTVS9V0S1UR115?qs=LMSg3oBIm%2FhM0z8LlgtRtQ%3D%3D
D5: "Diode", Manufacturer_Name=onsemi, Mouser Part Number=863-MBR140SFT1G, Arrow Part Number=MBR140SFT1G, Arrow Price/Stock=https://www.arrow.com/en/products/mbr140sft1g/on-semiconductor?region=nac, Datasheet Link=http://www.onsemi.com/pub/Collateral/MBR140SFT1-D.PDF, Height=0.98mm, Manufacturer_Part_Number=MBR140SFT1G, Mouser Price/Stock=https://www.mouser.co.uk/ProductDetail/onsemi/MBR140SFT1G?qs=3JMERSakebrc0eIUjXPasA%3D%3D
DP1 DP2 DP3: "TVS Diode (Uni-directional)", Manufacturer_Name=LITTELFUSE, Mouser Part Number=576-SMF3.3, Arrow Part Number=SMF3.3, Arrow Price/Stock=https://www.arrow.com/en/products/smf3.3/littelfuse?region=nac, Datasheet Link=https://componentsearchengine.com/Datasheets/2/SMF3.3.pdf, Height=1.08mm, Manufacturer_Part_Number=SMF3.3, Mouser Price/Stock=https://www.mouser.co.uk/ProductDetail/Littelfuse/SMF3.3?qs=5LChGqRbrjutbyo%2F8EojOg%3D%3D
GPS: "Integrated Circuit", Manufacturer_Name=Quectel, Mouser Part Number=277-L80-M39, Arrow Part Number=L80-M39, Arrow Price/Stock=https://www.arrow.com/en/products/l80-m39/quectel-wireless-solutions-co-ltd?region=nac, Datasheet Link=https://datasheet.datasheetarchive.com/originals/distributors/Datasheets_SAMA/54dad088769b805410b2916ae92dc7c0.pdf, Manufacturer_Part_Number=L80-M39, Mouser Price/Stock=https://www.mouser.co.uk/ProductDetail/Quectel/L80-M39?qs=GedFDFLaBXEPqYfo45AE6g%3D%3D
LEDP: "LED", Manufacturer_Name=Kingbright, Mouser Part Number=604-APT2012CGCK, Arrow Part Number=APT2012CGCK, Arrow Price/Stock=https://www.arrow.com/en/products/apt2012cgck/kingbright, Datasheet Link=https://componentsearchengine.com/Datasheets/1/APT2012CGCK.pdf, Height=0.5mm, Manufacturer_Part_Number=APT2012CGCK, Mouser Price/Stock=https://www.mouser.co.uk/ProductDetail/Kingbright/APT2012CGCK?qs=VdjlWU%2FzoOEv1TxC2gMNzg%3D%3D
LPC804: "Integrated Circuit", Manufacturer_Name=NXP, Mouser Part Number=771-LPC804M101JDH24F, Arrow Part Number=LPC804M101JDH24FP, Arrow Price/Stock=https://www.arrow.com/en/products/lpc804m101jdh24fp/nxp-semiconductors, Datasheet Link=http://www.nxp.com/docs/en/data-sheet/LPC802.pdf, Height=1.1mm, Manufacturer_Part_Number=LPC804M101JDH24FP, Mouser Price/Stock=https://www.mouser.co.uk/ProductDetail/NXP-Semiconductors/LPC804M101JDH24FP?qs=W0yvOO0ixfFXVpzMN0mefw%3D%3D
"Power Switch": "Switch", Manufacturer_Name="C & K COMPONENTS", Mouser Part Number=611-JS202011SCQN, Arrow Part Number=JS202011SCQN, Arrow Price/Stock=https://www.arrow.com/en/products/js202011scqn/ck?region=nac, Datasheet Link=https://www.ckswitches.com/media/1422/js.pdf, Height=5.5mm, Manufacturer_Part_Number=JS202011SCQN, Mouser Price/Stock=https://www.mouser.co.uk/ProductDetail/CK/JS202011SCQN?qs=LgMIjt8LuD95JYWxZ7NvZA%3D%3D
PWMLED: "LED", Arrow Part Number="LR T67F-U1AA-1-1-Z", Manufacturer_Name=OSRAM, Mouser Part Number=720-LRT67FU1AA11Z, Arrow Price/Stock=https://www.arrow.com/en/products/lrt67f-u1aa-1-1-z/osram-opto-semiconductors, Datasheet Link=https://4donline.ihs.com/images/VipMasterIC/IC/OSOS/OSOS-S-A0009011308/OSOS-S-A0009011308-1.pdf?hkey=52A5661711E402568146F3353EA87419, Height=2.1mm, Manufacturer_Part_Number="LR T67F-U1AA-1-1-Z", Mouser Price/Stock=https://www.mouser.co.uk/ProductDetail/OSRAM-Opto-Semiconductors/LR-T67F-U1AA-1-1-Z?qs=VcOkZLzzauas3WCY2bHy8A%3D%3D
R1 R2 RBOOTLOAD RNRESETIMU RSCLPULLUP RSDAPULLUP: library part CMP-009-00016-5, "Chip Resistor, 10 KOhm, +/- 1%, 0.25 W, -55 to 155 degC, 1206 (3216 Metric)", Case/Package=1206, Max Operating Temperature=155°C, Min Operating Temperature=-55°C, Power=250mW, Tolerance=1%, Voltage Rating=200V, Mounting Technology=SM, Pins=2, RoHS Compliant=True
R50 R51 R52 R53 R54 R55 R56 R57 RPWM: library part CMP-009-00033-5, "Chip Resistor, 4.7 KOhm, +/- 1%, 0.25 W, -55 to 155 degC, 1206 (3216 Metric)", Case/Package=1206, Max Operating Temperature=155°C, Min Operating Temperature=-55°C, Power=250mW, Tolerance=1%, Voltage Rating=200V, Mounting Technology=SM, Pins=2, RoHS Compliant=True
R331 R332: library part CMP-009-00011-5, "Chip Resistor, 1 KOhm, +/- 1%, 0.25 W, -55 to 155 degC, 1206 (3216 Metric)", Case/Package=1206, Max Operating Temperature=155°C, Min Operating Temperature=-55°C, Power=250mW, Tolerance=1%, Voltage Rating=200V, Mounting Technology=SM, Pins=2, RoHS Compliant=True
  R331: R33=510
"SWD PORT": library part CMP-002-00073-1, "Minitek127Â®, Shrouded Board to Board Header, Surface Mount, 10 positions, 1.27mm (0.500in) pitch.", Case/Package=None, Check_prices=https://www.snapeda.com/parts/20021521-00010C4LF/Amphenol/view-part/?ref=eda, Component Type=Standard, Design Item ID=20021521-00010C4LF, Digi-Key_Part_Number=609-6445-2-ND, MF="AMPHENOL ICC / FCI", MP=20021521-00010C4LF, Pins=10, Purchase-URL=https://pricing.snapeda.com/search/part/20021521-00010C4LF/?ref=eda, SnapEDA_Link=https://www.snapeda.com/parts/20021521-00010C4LF/Amphenol/view-part/?ref=snap, Source=20021521-00010C4LF.SchLib

## Free pads (board coordinates)
  round 1.524 hole 1: 3(95.176,2.427) 13(40.175,41.35) 14(41.25,49.936)
  oval 1.52x1.524 hole 1: 4(96.775,21.525)
  round 1.524 smd: 5(90.275,22.275) 6(95.25,14.775) 8(79.875,11.7) 9(60.925,83.025)
  round 1.75 hole 1: 10(43.5,52.6) 11(22.875,49.35)
  round 1.524 smd far side: 12(81.95,30.975)

## Via types
v1: diameter 0.8, hole 0.4, Top Layer to Bottom Layer, 42 vias
v2: diameter 1.27, hole 0.711, Top Layer to Bottom Layer, 41 vias
v3: diameter 4, hole 3, Top Layer to Bottom Layer, 4 vias

## Nets (pads, with @x,y where several pads share a name; then routed paths per layer and width w, separated by ;. In a path a pad name is that pad's centre, name@x,y a point inside that pad or via, vN(x,y) a via of type N, cw(c..) or ccw(c..) an arc to the next point about the centre after c; other vN are vias at no path point)
000: "3-8 DEC.15" pad.9 R50.1 | length 54.8
  Top Layer w0.508: R50.1 45.927,83.105 54.847,83.105 ; 57.15,44.704 56.713,44.704 55.25,46.166 55.25,82.702 54.847,83.105 ; pad.9 60.845,83.105 54.847,83.105
001: "3-8 DEC.14" R51.1 | length 43.2
  Top Layer w0.6: 57.15,43.434 64.184,43.434
  Top Layer w0.8: 64.184,43.434 72.898,52.148
  Top Layer w1: 72.898,52.148 R51.1
010: "3-8 DEC.13" R52.1 | length 30.5
  Top Layer w0.508: 57.15,42.164 78.668,42.164 ; R52.1@84.915,48.411 R52.1
  Top Layer w1: 78.668,42.164 R52.1@84.915,48.411
011: "3-8 DEC.12" R53.1 | length 27.2
  Top Layer w0.508: 57.15,40.894 66.606,40.894 ; R53.1 R53.1@74.549,26.549
  Top Layer w0.8: 66.606,40.894 74.549,32.951
  Top Layer w1: R53.1@74.549,26.549 74.549,32.951
100: "3-8 DEC.11" R54.1 | length 52.4
  Top Layer w0.508: R54.1 46,15.75 64.25,15.75 66.5,18 66.5,39 65.876,39.624 57.15,39.624
101: "3-8 DEC.10" R55.1 | length 64.6
  Top Layer w0.508: R55.1 27.78,20.25 33,20.25 34,21.25 54.25,21.25 57.75,17.75 62.75,17.75 64.775,19.775 64.775,35.975 62.396,38.354 57.15,38.354
110: "3-8 DEC.9" R56.1 | length 100.5
  Top Layer w0.508: R56.1 15.75,48.79 v2(15.75,46) ; 57.15,37.084 59.666,37.084 v2(61.25,35.5)
  Bottom Layer w0.508: v2(15.75,46) 14.298,46 14,45.702 14,30.75 15.5,29.25 15.5,14.5 18,12 27.5,12 33.3,17.8 48.3,17.8 61.25,30.75 v2(61.25,35.5)
111: "3-8 DEC.7" R57.1 | length 89.9
  Top Layer w0.508: R57.1 27.048,76.626 30.126,76.626 v2(30.25,76.75) ; 51.726,38.354 53.848,38.354 54.146,38.056 54.146,34.798 56.319,32.625 v2(59.2,32.625)
  Bottom Layer w0.508: v2(30.25,76.75) 32.25,76.75 33.75,78.25 58.25,78.25 59.25,77.25 59.25,32.675 v2(59.2,32.625)
GND: "3-8 DEC.4" "3-8 DEC.5" "3-8 DEC.8" "3.3V POWER.1" "SWD PORT.03" "SWD PORT.05" "SWD PORT.09" BNO055.2 BNO055.5 BNO055.6 BNO055.18 BNO055.25 C1.2 C2.2 C3.2 C4.2 C5.2 C6.2 C7.2 C10.2 C11.2 C13.2 C14.1 CDD.1 CIMUCAP.2 CIO.2 D000.1 D001.1 D4.2 D010.1 D011.1 D100.1 D101.1 D110.1 D111.1 DP1.2 DP2.2 DP3.2 GPS.3 GPS.12 LEDP.1 LPC804.19 pad.4 pad.6 pad.12 PWMLED.1 | length 122.9
  Top Layer w0.25: BNO055.6@45.695,30.934 BNO055.6
  Top Layer w0.3: v1(40.05,60.198) 42.277,62.425 C13.2@42.277,63.443 ; CDD.1@40.91,32.676 41.143,32.909 BNO055.25 ; 42.782,29.967 43.407,30.593 BNO055.2 43.407,31.674 ; BNO055.18 v1(43.908,36.75) ; 44.913,30.562 45.925,29.55
  Top Layer w0.35: 44.445,31.674 44.913,31.206 BNO055.5@44.913,30.847
  Top Layer w0.508: DP3.2 3.54,47.386 6.96,47.386 v2(6.975,47.371) D110.1 ; DP2.2 10.875,18.6 v2(14.225,18.6) 20.3,18.6 D101.1 21.75,18.55 v2(24.025,18.55) ; 20.1,54.275 20.125,54.3 20.125,55.95 ; D111.1 23.253,74.35 v2(24.925,74.35) ; LPC804.19 30.571,34.996 31.399,35.824 31.734,35.824 31.75,35.84 C4.2 32.994,35.86 C3.2@33.02,35.886 ; C2.2 32.971,33.459 33.02,33.508 C1.2 34.171,33.528 ; C3.2 C3.2@33.02,35.886 ; v2(36.5,31.096) C5.2 36.325,34.531 35.322,33.528 34.171,33.528 ; 38.456,60.198 C14.1 ; 38.858,60.198 39.75,61.09 C11.2 ; CDD.1@40.91,32.676 40.91,33.431 40.975,33.496 v1(40.975,33.575) ; CIO.2@42.76,28.25 CIO.2 42.782,29.967 ; 43.407,31.674 44.445,31.674 ; BNO055.6@45.72,30.814 46.984,29.55 ; 45.925,29.55 46.984,29.55 ; v1(48,28.375) CIMUCAP.2 46.984,29.55 ; C10.2 C10.2@49.199,40.894 ; D100.1@49.924,7.125 D100.1 ; D000.1 50.241,87.3 v2(53.6,87.3) ; v2(51.7,35.475) 51.7,37.058 51.726,37.084 ; 51.726,40.894 C10.2@49.199,40.894 ; 51.726,42.164 50.419,42.164 49.275,41.02 49.275,40.97 C10.2@49.199,40.894 ; v1(52.375,47.65) 52.375,49.301 PWMLED.1 ; 71.873,5.373 71.873,6.755 ; 72.499,4.485 72.286,4.699 72.115,4.699 72.115,3.864 72.45,3.529 72.45,2.548 72.748,2.25 74.365,2.25 74.365,2.149 74.749,1.765 ; v2(77.075,72.55) 77.075,74.408 D001.1 ; D011.1 v2(81.612,19.117) ; D010.1 v2(93.375,47.438) ; LEDP.1 91.738,16.037 v1@91.738,14.587 ; D4.2 91.75,12.875 91.75,14.55 v1(91.725,14.575) v1@91.738,14.587 ; pad.6 95.106,14.631 91.781,14.631 v1@91.738,14.587 ; C3.2@33.02,35.886 33.036,35.87 33.056,35.87 33.066,35.86 33.902,35.86 34.2,35.562 34.2,33.557 34.171,33.528
  Top Layer w0.8: v2(14.225,18.6) DP1.2 ; GPS.3 38.456,60.198 38.858,60.198
  Top Layer w1: v2(46.1,7.125) D100.1@49.924,7.125
  Bottom Layer w2.54: v2(81.612,19.117) 84.45,21.955 84.45,26.95 81.95,29.45 pad.12
  other v1: 70.45,4 37.622,9.875 37.572,19.15 13.847,28.725 59.222,31.375 48.475,34.2 16.449,35.237 61.347,36.75 19.297,37.5 35.775,40.75 17.147,41.05 40.75,42.725 40.697,43.825 61.597,44.959 41.072,47.425 61.722,48.2 37.49,49.479 39.7,49.479 21.555,50.315 44.025,51.05 40.75,55.575 38.724,59.05 39.434,59.672 30.297,75.475
  other v2: 12.8,33.35 12.8,34.825 12.75,36.5 49.375,43.225 18.15,54.275
GPSEN: LPC804.14 | length 38.7
  Top Layer w0.508: LPC804.14 31.384,31.746 32.034,31.096 v1@33.75,31.096 ; v2(33.75,51.75) 33.766,51.766 37.942,51.766 39.176,53 40.75,53 42.667,54.917 42.667,55.138 v2(44.729,57.201)
  Bottom Layer w0.508: v1(33.75,31) v2(33.75,51.75)
IMUNRESET: BNO055.11 LPC804.11 RNRESETIMU.1 | length 62.7
  Top Layer w0.3: BNO055.11 50.5,33.409
  Top Layer w0.508: LPC804.11@23.121,31.717 20.798,31.717 20.5,31.419 20.5,27.798 20.798,27.5 30,27.5 34.25,23.25 51.25,23.25 52.25,24.25 52.25,31.659 50.5,33.409 50.5,33.725 45.5,38.725 RNRESETIMU.1
INT: BNO055.14 LPC804.4 | length 57.1
  Top Layer w0.3: BNO055.14@45.97,34.909 v1(47.5,34.909)
  Top Layer w0.508: v2(17.25,39.75) 17.259,39.741 18.647,39.741 22.092,36.296 LPC804.4
  Bottom Layer w0.508: v2(17.25,39.75) 15.75,39.75 14.984,38.984 14.984,32.016 18.25,28.75 36.75,28.75 38.125,30.125 45.75,30.125 47.444,31.819 47.444,34.853 v1(47.5,34.909)
"Net3.3V POWER_3": "3.3V POWER.3" "Power Switch.1" "Power Switch.6" C7.1 | length 18.5
  Top Layer w0.508: C7.1 76.2,2.3 76.276,2.376 76.326,2.376 77.05,3.1 77.05,5.95 ; 77.05,6.35 77.05,5.95 ; 77.45,5.95 77.05,5.95
  Top Layer w1: 77.45,5.95 79.75,3.65 ; 84.896,3.65 90.25,3.65
  Top Layer w1.2: 79.75,3.65 84.75,3.65
NetBNO055_4: BNO055.4 RBOOTLOAD.2 | length 8
  Top Layer w0.3: BNO055.4 44.407,30.093 44.908,29.593
  Top Layer w0.4: 44.908,29.218 44.908,29.593
  Top Layer w0.508: 44.908,29.218 46.625,27.5 48.477,27.5 48.775,27.202 RBOOTLOAD.2
NetBNO055_9: BNO055.9 CIMUCAP.1 | length 3.6
  Top Layer w0.3: BNO055.9 47,32.409
  Top Layer w0.508: 47,32.409 47.702,32.409 48,32.111 CIMUCAP.1
NetD000_2: D000.2 R50.2 | length 10.5
  Top Layer w1: R50.2 45.847,92.278 46.145,92.576 D000.2
NetD001_2: D001.2 R51.2 | length 6.2
  Top Layer w0.508: R51.2 R51.2@73.073,78.994
  Top Layer w1: R51.2@73.073,78.994 74.971,80.892 D001.2
NetD5_1: "Power Switch.2" "Power Switch.5" D5.1 | length 11.1
  Top Layer w1: 85.8,6.223 90.25,6.223 ; 90.25,6.15 90.35,6.25 91.875,6.25 95.165,9.54 95.165,9.79 D5.1
NetD010_2: D010.2 R52.2 | length 5.6
  Top Layer w1: R52.2 88.943,51.411 D010.2
NetD011_2: D011.2 R53.2 | length 3.2
  Top Layer w1: R53.2 D011.2@77.669,23.5
NetD100_2: D100.2 R54.2 | length 4.4
  Top Layer w0.508: D100.2@50.099,12.5 D100.2
  Top Layer w1: R54.2 D100.2@50.099,12.5
NetD101_2: D101.2 R55.2 | length 5.5
  Top Layer w1: D101.2@22.156,23.344 R55.2
NetD110_2: D110.2 R56.2 | length 5.9
  Top Layer w0.508: D110.2 D110.2@10.939,51.792
  Top Layer w1: D110.2@10.939,51.792 R56.2
NetD111_2: D111.2 R57.2 | length 5.7
  Top Layer w1: D111.2 23.301,79.502 R57.2
NetDGPSEN_2: 
NetDTimer_1: GPS.7
NetLEDP_2: LEDP.2 pad.5 R331.2 R332.2 | length 12.8
  Top Layer w0.7: 90.25,17.95 LEDP.2
  Top Layer w1: R331.2 R331.2@87.675,18 ; 90.2,18 R331.2@87.675,18 ; pad.5 87.875,19.875 87.875,18.2 R331.2@87.675,18
  Top Layer w1.2: R332.2 R331.2
NetPWMLED_2: PWMLED.2 RPWM.2 | length 6
  Top Layer w1: RPWM.2 46.925,51.5 47.681,52.256 PWMLED.2
P12: "3-8 DEC.2" LPC804.5 | length 44.7
  Top Layer w0.508: LPC804.5 23.632,35.673 25.348,35.673 v1(25.375,35.7) ; v1(49.294,44.75) 49.317,44.727 51.703,44.727 51.726,44.704
  Bottom Layer w0.508: v1(25.375,35.7) 25.375,30.375 25.75,30 37.138,30 40,32.862 40,35.75 41.716,37.466 41.716,42.952 42.014,43.25 44.5,43.25 46,44.75 v1(49.294,44.75)
P18: "3-8 DEC.1" LPC804.1 | length 32.4
  Top Layer w0.508: LPC804.1 23.605,39.88 28.575,44.85 v2(39.934,44.85) ; v1(49.294,46) 49.307,45.987 51.713,45.987 51.726,45.974
  Bottom Layer w0.508: v2(39.934,44.85) 40.059,44.725 44.725,44.725 46,46 v1(49.294,46)
P20: "3-8 DEC.3" LPC804.13 | length 47.8
  Top Layer w0.508: LPC804.13 29.936,31.096 35.282,25.75 v1(38.75,25.75) ; 51.726,43.434 51.759,43.467 53.717,43.467 v1(53.75,43.5)
  Bottom Layer w0.508: v1(38.75,25.75) 42.5,22 47.25,22 53.75,28.5 v1(53.75,43.5)
PC_ADDR_SEL: BNO055.17 LPC804.24 | length 24
  Top Layer w0.3: BNO055.17 44.407,36.003
  Top Layer w0.4: 44.407,36.003 44.579,36.174 44.966,36.174 45.542,36.75 v1(45.65,36.75)
  Top Layer w0.508: LPC804.24 33.496,38.246 35,39.75 36.75,39.75 38.822,37.678 38.822,36.481 39.735,35.568 40.007,35.568 v1(40.975,34.6)
  Bottom Layer w0.508: v1(40.975,34.6) 41.012,34.637 41.012,35.762 42.9,37.65 44.75,37.65 v1(45.65,36.75)
PWMLED: LPC804.12 RPWM.1 | length 39.6
  Top Layer w0.508: LPC804.12 25.129,31.096 26.25,32.217 26.25,36.875 28.25,38.875 28.25,39.202 28.548,39.5 30.984,39.5 33.234,41.75 v1(34.65,41.75) ; v2(37.25,50.75) 39.478,50.75 39.978,51.25 42,51.25 44.75,48.5 RPWM.1
  Bottom Layer w0.508: v1(34.65,41.75) 34.65,48.65 35.627,49.627 36.127,49.627 v2(37.25,50.75)
Reset: "SWD PORT.10" LPC804.6 | length 23.8
  Top Layer w0.508: 5,37.04 5,38.702 5.298,39 13.5,39 v2(16,36.5) ; v2(20.25,36.5) 21.754,34.996 LPC804.6
  Top Layer w0.7: 5,37.04 6.8,37.04
  Bottom Layer w0.508: v2(16,36.5) v2(20.25,36.5)
SCL: BNO055.19 LPC804.3 pad.14 RSCLPULLUP.1 | length 47.1
  Top Layer w0.3: 43,38.407 43,36.481 43.197,36.284 43.197,35.744 43.407,35.534 BNO055.19
  Top Layer w0.508: LPC804.3 22.604,36.946 20.75,38.8 20.75,43.25 23.775,46.275 RSCLPULLUP.1 26.475,46.525 26.896,46.946 27.146,46.946 28.7,48.5 41.3,48.5 ; pad.14 41.219,49.481 41.219,48.581 41.3,48.5 ; 43,38.407 43,48.202 42.702,48.5 41.3,48.5
SDA: BNO055.20 LPC804.2 pad.13 RSDAPULLUP.1 | length 31.1
  Top Layer w0.3: 41.388,35.409 BNO055.20
  Top Layer w0.35: 40.25,36.547 41.388,35.409
  Top Layer w0.4: 40.25,36.547 40.25,38.077
  Top Layer w0.508: LPC804.2 23.634,37.625 24.927,37.625 25.225,37.923 25.225,39.95 28.5,43.225 RSDAPULLUP.1 37.25,41.077 40.175,38.152 ; pad.13 40.175,38.152 ; 40.25,38.077 40.175,38.152
SWCLK: "SWD PORT.04" DP3.1 LPC804.8 R2.2 | length 40.9
  Top Layer w0.508: DP3.1 5.225,44.25 6.975,42.5 R2.2 ; 6.8,33.23 5.02,33.23 3.5,34.75 3.5,41.952 3.798,42.25 R2.2 ; LPC804.8 20.829,33.696 10.85,43.675 7.694,43.675 7.396,43.377 7.396,42.671 R2.2
SWDIO: "SWD PORT.02" DP2.1 LPC804.9 R1.2 | length 44.5
  Top Layer w0.508: 6.8,31.96 4.79,31.96 3.5,30.67 3.5,24.548 3.798,24.25 R1.2 7.337,24.137 7.337,21.935 ; DP2.1@7.337,18.9 7.337,21.75 7.337,21.935 ; LPC804.9 20.546,33.046 16.9,29.4 16.9,22.048 16.602,21.75 7.523,21.75 7.337,21.935
"USART0 LPCRXD": GPS.2 LPC804.16 pad.11 | length 56.3
  Top Layer w0.4: v1(27.5,33.046) LPC804.16@29.456,33.046
  Top Layer w1: GPS.2 39.426,57.658 v2(39.434,57.65)
  Bottom Layer w0.508: v1(27.5,33.046) 27.5,36.806 27,37.306 27,47.75 32.405,53.155 36.186,53.155 39.5,56.469 39.5,57.584 v2(39.434,57.65)
  Bottom Layer w1: pad.11 33.709,57.451 33.975,57.65 v2(39.434,57.65)
"USART0 LPCTXD": GPS.1 LPC804.17 pad.10 | length 39.9
  Top Layer w0.4: LPC804.17@29.51,33.667 30.383,33.667
  Top Layer w0.508: 30.383,33.667 31.931,32.119 35.259,32.119 35.64,32.5 v1(35.719,32.5) ; v2@39.794,54.5 v2(40,54.5)
  Top Layer w1: GPS.1 39.176,55.118 v2@39.794,54.5
  Bottom Layer w0.508: v1(35.719,32.5) 38,32.5 38.668,33.168 38.668,53.168 v2(40,54.5) 40.146,54.354 40.996,54.354 pad.10
VCC: D4.1 D5.2 pad.3 | length 14.5
  Top Layer w0.508: pad.3 pad.3@95.201,2.451
  Top Layer w1: D4.1 97.2,12.85 97.925,12.125 97.925,9.61 95.201,6.886 pad.3@95.201,2.451
VDD33: "3-8 DEC.6" "3-8 DEC.16" "3.3V POWER.2" "3.3V POWER.4" "SWD PORT.01" BNO055.3 BNO055.28 C1.1 C2.1 C3.1 C4.1 C5.1 C6.1 C10.1 C11.1 C13.1 C14.2 CDD.2 CIO.1 DP1.1 GPS.4 LPC804.18 LPC804.21 pad.8 R1.1 R2.1 R331.1 R332.1 RBOOTLOAD.1 RNRESETIMU.2 RSCLPULLUP.2 RSDAPULLUP.2 | length 302.5
  Top Layer w0.3: 40.376,61.89 C13.1@41.632,63.146 ; CDD.2@41.014,31.585 41.19,31.409 BNO055.28
  Top Layer w0.35: 43.908,29.125 BNO055.3
  Top Layer w0.508: R2.1 10.025,42 11.629,40.396 12.429,40.396 v2(12.575,40.25) ; R1.1 10.275,24.5 12.725,26.95 v2(12.725,29.55) 12.579,29.696 12.579,30.901 11.52,31.96 10.7,31.96 ; RSCLPULLUP.2@29.25,46.275 RSDAPULLUP.2 37.3,46.225 41.25,46.225 v2(41.3,46.175) ; LPC804.18@29.452,34.375 28.548,34.375 28.25,34.673 28.25,35.998 28.548,36.296 LPC804.21 30.71,36.296 31.091,36.677 31.512,36.677 31.513,36.676 31.734,36.676 C4.1@31.75,36.66 ; LPC804.18@29.49,34.355 31.873,34.355 C2.1 32.989,34.359 33.02,34.328 C1.1 ; C4.1 C4.1@31.75,36.66 ; C5.1@36.195,38.002 35.939,37.746 35.885,37.746 35.885,37.202 35.604,36.922 34.886,36.922 34.65,36.686 C3.1 31.988,36.686 31.978,36.676 31.766,36.676 C4.1@31.75,36.66 ; 36.6,65.278 40.338,65.278 41.52,64.096 C13.1@41.52,63.195 ; C14.2 38.456,62.738 ; 38.822,31.8 40.58,31.8 ; 38.922,62.738 39.75,61.91 C11.1 40.376,61.89 ; 40.522,31.468 40.843,31.468 ; 43.908,29.125 43.908,28.375 CIO.1 44.055,28.25 45.5,26.805 ; RNRESETIMU.2 45.5,41.775 47.781,39.494 C10.1 49.199,39.494 49.329,39.624 51.726,39.624 54.651,39.624 55.225,39.05 55.225,35.475 56.7,34 59.759,34 59.984,34.225 v2(63.25,34.225) ; C6.1 73.95,5.15 74.75,5.95 74.75,6.35 74.75,8.199 74.801,8.25 ; R332.1@83.933,15.159 84.25,15.79 R332.1
  Top Layer w0.635: v2(39.875,19.45) 39.763,19.338 39.763,8.988 v2(39.65,8.875) 39.65,5.475 41.525,3.6 ; 57.15,45.974 v2(63.124,45.974) v2@63.15,46 ; 71.8,12.525 71.925,12.65 72.5,12.65 74.75,12.65 74.75,10.951 74.699,10.9
  Top Layer w0.7: 38.822,31.8 38.822,35.134
  Top Layer w0.8: C5.1 36.675,37.281 38.822,35.134 ; v2@36.875,71.063 34.069,71.063 33.6,70.594 33.6,64.988 35.85,62.738 GPS.4 38.456,62.738 38.922,62.738 ; v2(56.875,49.3) 56.925,49.25 63.1,49.25 v2(63.15,49.2)
  Top Layer w1: R1.1 13.35,24.25 14.038,23.563 14.15,23.563 14.225,23.488 DP1.1 ; 41.7,25.75 RBOOTLOAD.1 45.55,25.925 45.55,26.711 ; pad.8 80.95,11.7 R332.1
  Top Layer w1.2: R332.1 R331.1
  Bottom Layer w0.508: v2(12.575,40.25) 8.798,40.25 8.5,39.952 8.5,30.875 9.825,29.55 v2(12.725,29.55) 12.725,12.975 16.85,8.85 39.625,8.85 v2(39.65,8.875) ; v2(41.3,46.175) 44.466,46.175 45.491,47.2 50.563,47.2 50.938,46.825 52.975,46.825 55.45,49.3 v2(56.875,49.3) v2@57.129,49.3
  Bottom Layer w0.635: v2(39.875,19.45) 35.925,23.4 35.925,26.703 36.297,27.075 38.711,27.075 v2(40.011,28.375)
  Bottom Layer w0.8: v2(36.875,71.125) 36.875,72.106 37.344,72.575 56.406,72.575 56.875,72.106 v2(56.875,49.3)
  other v2: 67.875,11.15
"": GPS.5
pads on no net: "Power Switch.3" "Power Switch.4" "SWD PORT.06" "SWD PORT.07" "SWD PORT.08" BNO055.1 BNO055.7 BNO055.8 BNO055.10 BNO055.12 BNO055.13 BNO055.15 BNO055.16 BNO055.21 BNO055.22 BNO055.23 BNO055.24 BNO055.26 BNO055.27 GPS.6 GPS.8 GPS.9 GPS.10 GPS.11 LPC804.7 LPC804.10 LPC804.15 LPC804.20 LPC804.22 LPC804.23
copper on no net:
  other v3: 0.625,0 99.575,0 99.486,100.055 0.625,100.15

## Polygon pours and split planes (outlines as drawn)
VDD33 on Top Layer "VDD33_L01_P017" (solid, pour order 17): 38.25,20.4 41.3,20.4 41.3,6.4 43.775,3.925 58.025,3.925 67.975,13.875 74.175,13.875 74.175,10.8 74.801,10.174 74.801,8.25 68.375,8.25 61.775,1.65 38.3,1.65
VDD33 on Top Layer "VDD33_L01_P016" (solid, pour order 16): 38.822,31.84 39.038,31.624 41.11,31.624 41.11,27.69 42.962,25.837 44.908,25.837 44.908,25.25 41.275,25.65 41.2,25.872 38.822,28.25
VDD33 on Top Layer "VDD33_L01_P007" (solid, pour order 7): 74.225,6.25 75.4,6.25 75.45,6.3 75.45,11.275 76.325,11.275 76.95,11.9 76.95,13.575 78.275,13.575 78.875,14.175 88.575,14.175 88.575,15.8 88.275,16.1 74.475,16.1 72.075,13.7 72.075,12.325 74.175,10.225 74.175,6.275
GND on Top Layer "GND_L01_P008" (solid, pour order 8): 69.625,6.825 69.625,6.7 69.625,3.875 72.225,1.275 75.35,1.275 75.35,1.7 74.8,2.25 72.748,2.25 72.748,6.853
GND on Top Layer "GND_L01_P015" (solid, remove dead copper, pour order 15): 13.525,37.65 13.525,32.725 13.375,32.575 9.15,32.575 9.15,37.65
GND on Top Layer "GND_L01_P012" (solid, pour order 12): 48.5,43.925 48.525,43.925 50.419,43.925 50.419,42.164 49.225,40.97 49.225,41.925 48.5,42.65
GND on Top Layer "GND_L01_P010" (solid, pour order 10): 37.95,60.644 37.95,58.7 38.075,58.575 39.319,58.575 39.794,59.05 40.05,59.05 40.575,59.575 40.575,60.644
GND on Top Layer "GND_L01_P009" (solid, pour order 9): 17.108,57.225 18.8,57.225 18.8,56.65 19.25,56.2 20.55,56.2 20.55,54.4 19.65,53.5 17.108,53.5
VDD33 on Bottom Layer "VDD33_L04_P018" (solid, pour order 18): 62.4,50.625 62.4,50.475 62.4,13.075 68.55,9.5 68.55,50.695
GND on L2GP "GND_L02_P000" (solid, pour order 0): 1.25,94.96 cw(c3.79,94.96) 3.79,97.5 96.75,97.5 cw(c96.75,95.5) 98.75,95.5 98.75,3.79 cw(c96.21,3.79) 96.21,1.25 3.75,1.25 cw(c3.75,3.75) 1.25,3.75
GND on L3GP "GND_L03_P001" (solid, pour order 1): 1.25,94.96 cw(c3.79,94.96) 3.79,97.5 96.75,97.5 cw(c96.75,95.5) 98.75,95.5 98.75,3.79 cw(c96.21,3.79) 96.21,1.25 3.75,1.25 cw(c3.75,3.75) 1.25,3.75

## Keep-outs
Keep-Out Layer:
  the board outline again, w0.254

## Other copper
Multi-Layer:
  lines w0.254: -3.865,0.566 ccw(c1.135,0.566) 1.135,-4.434 99.153,-4.434 ccw(c99.153,0.566) 104.153,0.566 104.153,99.728 ccw(c99.153,99.728) 99.153,104.728 1.135,104.728 ccw(c1.135,99.728) -3.865,99.728 -3.865,0.566

## Silkscreen, mask and mechanical layers (free items; w line width, h text height)
Top Overlay:
  text "LEDTEST" at 60.729,85.354 h1.52
  text "USART_TXD" at 44.604,54.337 h0.8
  text "USARTRXD" at 24.154,51.279 h0.8
  text "LEDPTEST" at 87.925,23.709 h0.8
  text "GNDTEST" at 96.829,19.721 h0.8 r270
  text "VDDTEST" at 81.625,11.034 h0.8
  text "Revision3" at 5.554,3.204 h1.52
Bottom Overlay:
  text "L" at 42.521,49.129 h0.8
  text "A" at 39.921,42.554 h0.8
  text "GNDTEST" at 84.621,33.404 h0.8